# Altium PCB CLARA_PCB.PcbDoc
Units mil, origin at the board's own origin, x right, y up, seen from the top; angles counter-clockwise.
Board outline 1738.65 x 1689.34 mil, 2 copper layers (Top Layer, Bottom Layer); 108 components, 126 nets, 415 pads, 0 vias.
Unrouted connection lines stored in the file: 243.
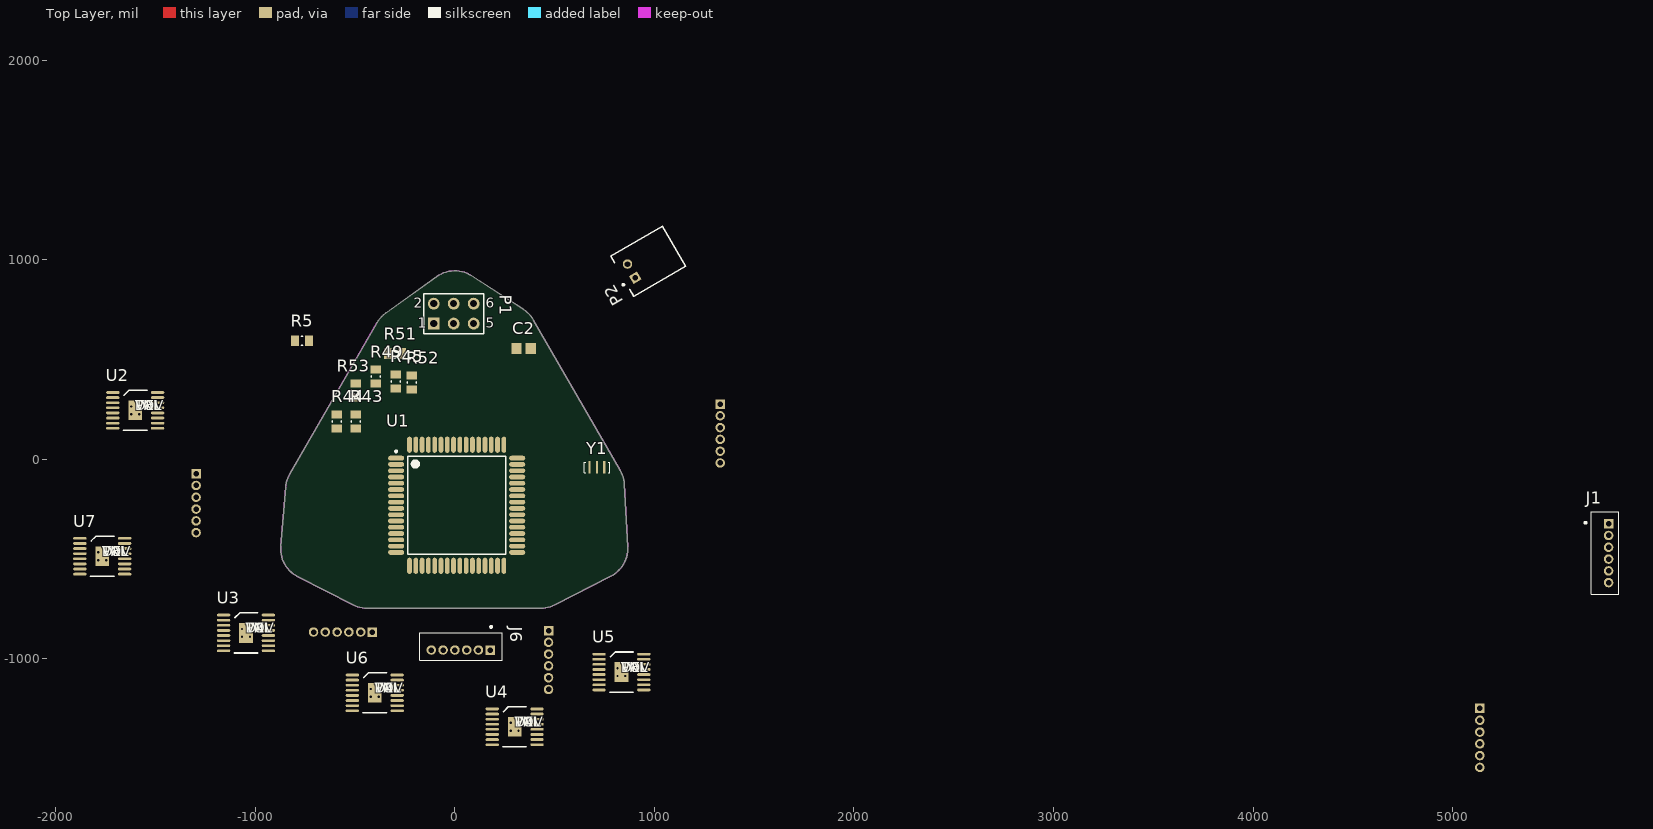
[diagram p0: Top Layer view]
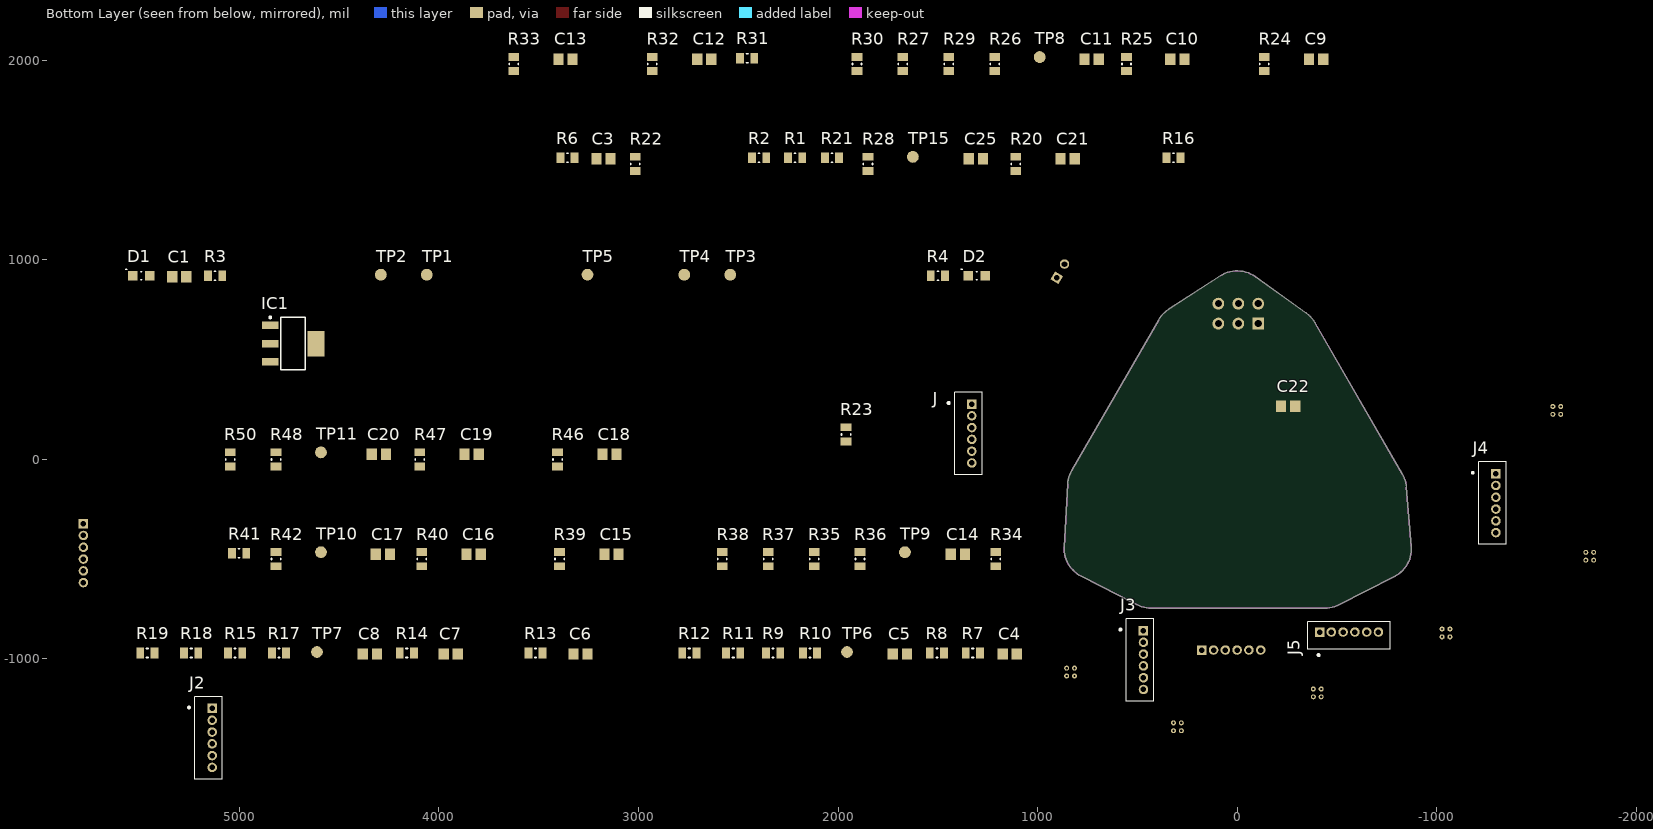
[diagram p1: Bottom Layer view, seen from below]

## Layer stack, top to bottom
Top Solder: solder mask 0.4, Solder Resist, Dk 3.5
Top Layer: signal copper 1.4
Dielectric 1: dielectric 12.6, FR-4, Dk 4.8
Bottom Layer: signal copper 1.4
Bottom Solder: solder mask 0.4, Solder Resist, Dk 3.5

## Board outline
-785.88,-587.88 -510.11,-728.16 ccw(c-438.7,-587.8) -438.7,-745.28 430.67,-745.28 ccw(c430.67,-587.8) 502.07,-728.16 780.68,-586.44 ccw(c709.28,-446.07) 866.54,-437.73 849.98,-125.58 ccw(c692.72,-133.93) 829.1,-55.19 394.41,697.72 ccw(c258.03,618.98) 343.89,750.99 86.11,918.64 ccw(c0.25,786.62) -91.43,914.66 -344.46,733.48 ccw(c-252.77,605.44) -389.16,684.18 -826.87,-73.96 ccw(c-690.48,-152.7) -847.45,-139.93 -871.44,-434.75 ccw(c-714.47,-447.52)

## Design rules (kind name [scope] priority, off if disabled: settings)
Clearance Clearance_1 [All] p1: gap=5 ignorepadtopadclearanceinfootprint=TRUE except(0: Arc-Hole Track-Hole SMDPad-Hole THPad-Hole Via-Hole Fill-Hole Poly-Hole Region-Hole Text-Hole; 10: Arc-SMDPad Track-SMDPad)
Clearance [All] p2: gap=10 ignorepadtopadclearanceinfootprint=FALSE except(0: Arc-Hole Track-Hole SMDPad-Hole THPad-Hole Via-Hole Fill-Hole Poly-Hole Region-Hole Text-Hole)
ComponentClearance ComponentClearance_1 [All] p1: gap=10 collisioncheckmode=3 verticalgap=10 showdistances=FALSE
PolygonConnect [All] p1: connectstyle=Relief reliefconductorwidth=10 reliefentries=4 polygonreliefangle="90 Angle" airgapwidth=10
RoutingVias [All] p1: holewidth=28 width=50 viastyle="Through Hole" minholewidth=28 minwidth=50 maxholewidth=28 maxwidth=50
SMDNeckDown [All] p1: percent=50.000
SolderMaskExpansion [All] p1: expansion=4 istentingtop=FALSE
Width [All] p1: maxlimit=10 minlimit=5 preferedwidth=10
29 further rules are at their usual default settings.

## Classes and differential pairs
component class MICROCONTROLLER: C1 C2 D1 D2 IC1 P1 P2 R3 R4 R5 R53 TP1 TP2 TP3 TP4 TP5 U1 Y1
component class LEAD_SCREW_MOTOR: C18 C19 C20 J6 R46 R47 R48 R49 R50 R51 R52 TP11
component class DRIVE_MOTORS: C9 C10 C11 C12 C13 C14 C15 C16 C17 J3 J4 J5 R24 R25 R26 R27 R29 R30 R31 R32 R33 R34 R35 R36 R37 R38 R39 R40 R41 R42 R43 R44 R45 TP8 TP9 TP10 U5 U6 U7
component class CABLE_MOTOR_DRIVERS: C3 C4 C5 C6 C7 C8 C21 C22 C25 J J1 J2 R1 R2 R6 R7 R8 R9 R10 R11 R12 R13 R14 R15 R16 R17 R18 R19 R20 R21 R22 R23 R28 TP6 TP7 TP15 U2 U3 U4

## Components (designator, comment, footprint, x,y, rotation, side; value= is the part's Value field where it differs from the comment)
C1 "10uF" CAP_ADJ_0805 5300,915 r180 bottom
C2 "10uF" CAP_ADJ_0805 345.43,555 r0 top
C3 "100nF" CAP_ADJ_0805 3175,1505 r180 bottom
C4 "100nF" CAP_ADJ_0805 1140,-975 r180 bottom
C5 "33nF" CAP_ADJ_0805 1690,-975 r180 bottom
C6 "100nF" CAP_ADJ_0805 3290,-975 r180 bottom
C7 "100nF" CAP_ADJ_0805 3940,-975 r180 bottom
C8 "33nF" CAP_ADJ_0805 4345,-975 r180 bottom
C9 "100nF" CAP_ADJ_0805 -395,2005 r180 bottom
C10 "100nF" CAP_ADJ_0805 300,2005 r180 bottom
C11 "33nF" CAP_ADJ_0805 730,2005 r180 bottom
C12 "100nF" CAP_ADJ_0805 2670,2005 r180 bottom
C13 "100nF" CAP_ADJ_0805 3365,2005 r180 bottom
C14 "33nF" CAP_ADJ_0805 1400,-475 r180 bottom
C15 "100nF" CAP_ADJ_0805 3135,-475 r180 bottom
C16 "100nF" CAP_ADJ_0805 3825,-475 r180 bottom
C17 "33nF" CAP_ADJ_0805 4280,-475 r180 bottom
C18 "100nF" CAP_ADJ_0805 3145,25 r180 bottom
C19 "100nF" CAP_ADJ_0805 3835,25 r180 bottom
C20 "33nF" CAP_ADJ_0805 4300,25 r180 bottom
C21 "100nF" CAP_ADJ_0805 850,1505 r180 bottom
C22 "100nF" CAP_ADJ_0805 -254.57,265 r180 bottom
C25 "33nF" CAP_ADJ_0805 1310,1505 r180 bottom
D1 "Green" LED_150080VS75000 5490,920 r180 bottom
D2 "Yellow" LED_150080VS75000 1305,920 r180 bottom
IC1 "NCP1117LPST50T3GOSCT-ND" NCP1117LPST50T3GOSCT-ND 4730,580 r180 bottom
J "B6B-ZR(LF)(SN)" JST_B6B-ZR(LF)(SN) 1330,129.53 r90 bottom
J1 "B6B-ZR(LF)(SN)" JST_B6B-ZR(LF)(SN) 5780,-470 r90 top
J2 "B6B-ZR(LF)(SN)" JST_B6B-ZR(LF)(SN) 5135,-1395.47 r90 bottom
J3 "B6B-ZR(LF)(SN)" JST_B6B-ZR(LF)(SN) 470,-1005 r90 bottom
J4 "B6B-ZR(LF)(SN)" JST_B6B-ZR(LF)(SN) -1295,-219.53 r90 bottom
J5 "B6B-ZR(LF)(SN)" JST_B6B-ZR(LF)(SN) -559.53,-865 r0 bottom
J6 "B6B-ZR(LF)(SN)" JST_B6B-ZR(LF)(SN) 30.47,-955 r0 top
P1 "ISP" HDR2X3 -105,680 r0 top
P2 "S2B-PH-K-S(LF)(SN)" JST-S2B-PH-K-S_V 968.85,992.32 r120 top
R1 "10KR" RES_ADJ_0805_YAGEO 2215,1510 r180 bottom
R2 "10KR" RES_ADJ_0805_YAGEO 2395,1510 r180 bottom
R3 "680R" RES_ADJ_0805_YAGEO 5120,920 r180 bottom
R4 "680R" RES_ADJ_0805_YAGEO 1500,920 r180 bottom
R5 "10KR" RES_ADJ_0805_YAGEO -765,595 r0 top
R6 "10KR" RES_ADJ_0805_YAGEO 3355,1510 r180 bottom
R7 "10KR" RES_ADJ_0805_YAGEO 1325,-970 r180 bottom
R8 "10KR" RES_ADJ_0805_YAGEO 1505,-970 r180 bottom
R9 "10KR" RES_ADJ_0805_YAGEO 2325,-970 r180 bottom
R10 "10KR" RES_ADJ_0805_YAGEO 2140,-970 r180 bottom
R11 "100mR" RES_ADJ_0805_YAGEO 2525,-970 r180 bottom
R12 "10KR" RES_ADJ_0805_YAGEO 2745,-970 r180 bottom
R13 "10KR" RES_ADJ_0805_YAGEO 3515,-970 r180 bottom
R14 "10KR" RES_ADJ_0805_YAGEO 4160,-970 r180 bottom
R15 "10KR" RES_ADJ_0805_YAGEO 5020,-970 r180 bottom
R16 "10KR" RES_ADJ_0805_YAGEO 320,1510 r180 bottom
R17 "10KR" RES_ADJ_0805_YAGEO 4800,-970 r180 bottom
R18 "100mR" RES_ADJ_0805_YAGEO 5240,-970 r180 bottom
R19 "10KR" RES_ADJ_0805_YAGEO 5460,-970 r180 bottom
R20 "10KR" RES_ADJ_0805_YAGEO 1110,1480 r90 bottom
R21 "10KR" RES_ADJ_0805_YAGEO 2030,1510 r180 bottom
R22 "10KR" RES_ADJ_0805_YAGEO 3015,1480 r90 bottom
R23 "10KR" RES_ADJ_0805_YAGEO 1960,125 r90 bottom
R24 "10KR" RES_ADJ_0805_YAGEO -135,1980 r90 bottom
R25 "10KR" RES_ADJ_0805_YAGEO 555,1980 r90 bottom
R26 "100mR" RES_ADJ_0805_YAGEO 1215,1980 r90 bottom
R27 "10KR" RES_ADJ_0805_YAGEO 1675,1980 r90 bottom
R28 "100mR" RES_ADJ_0805_YAGEO 1850,1480 r90 bottom
R29 "10KR" RES_ADJ_0805_YAGEO 1445,1980 r90 bottom
R30 "10KR" RES_ADJ_0805_YAGEO 1905,1980 r90 bottom
R31 "10KR" RES_ADJ_0805_YAGEO 2455,2010 r180 bottom
R32 "10KR" RES_ADJ_0805_YAGEO 2930,1980 r90 bottom
R33 "10KR" RES_ADJ_0805_YAGEO 3625,1980 r90 bottom
R34 "10KR" RES_ADJ_0805_YAGEO 1210,-500 r90 bottom
R35 "10KR" RES_ADJ_0805_YAGEO 2120,-500 r90 bottom
R36 "10KR" RES_ADJ_0805_YAGEO 1890,-500 r90 bottom
R37 "100mR" RES_ADJ_0805_YAGEO 2350,-500 r90 bottom
R38 "10KR" RES_ADJ_0805_YAGEO 2580,-500 r90 bottom
R39 "10KR" RES_ADJ_0805_YAGEO 3395,-500 r90 bottom
R40 "10KR" RES_ADJ_0805_YAGEO 4085,-500 r90 bottom
R41 "10KR" RES_ADJ_0805_YAGEO 5000,-470 r180 bottom
R42 "10KR" RES_ADJ_0805_YAGEO 4815,-500 r90 bottom
R43 "100mR" RES_ADJ_0805_YAGEO -495,190 r90 top
R44 "10KR" RES_ADJ_0805_YAGEO -590,189.57 r90 top
R45 "10KR" RES_ADJ_0805_YAGEO -295,390 r90 top
R46 "10KR" RES_ADJ_0805_YAGEO 3405,0 r90 bottom
R47 "10KR" RES_ADJ_0805_YAGEO 4095,0 r90 bottom
R48 "100mR" RES_ADJ_0805_YAGEO 4815,0 r90 bottom
R49 "10KR" RES_ADJ_0805_YAGEO -395,414.57 r90 top
R50 "10KR" RES_ADJ_0805_YAGEO 5045,0 r90 bottom
R51 "10KR" RES_ADJ_0805_YAGEO -300,530 r0 top
R52 "10KR" RES_ADJ_0805_YAGEO -215,384.57 r90 top
R53 "10KR" RES_ADJ_0805_YAGEO -495,344.57 r90 top
TP1 "TEST_POINT" TEST_POINT 4060,925 r180 bottom
TP2 "TEST_POINT" TEST_POINT 4290,925 r90 bottom
TP3 "TEST_POINT" TEST_POINT 2540,925 r90 bottom
TP4 "TEST_POINT" TEST_POINT 2770,925 r90 bottom
TP5 "TEST_POINT" TEST_POINT 3255,925 r90 bottom
TP6 "TEST_POINT" TEST_POINT 1955,-965 r90 bottom
TP7 "TEST_POINT" TEST_POINT 4610,-965 r90 bottom
TP8 "TEST_POINT" TEST_POINT 990,2015 r90 bottom
TP9 "TEST_POINT" TEST_POINT 1665,-465 r90 bottom
TP10 "TEST_POINT" TEST_POINT 4590,-465 r90 bottom
TP11 "TEST_POINT" TEST_POINT 4590,35 r90 bottom
TP15 "TEST_POINT" TEST_POINT 1625,1515 r90 bottom
U1 "ATmega64A-AU" 64A_M 10,-230 r0 top
U2 "DRV8801PWPR" PWP0016B_N -1600.32,245.31 r0 top
U3 "DRV8801PWPR" PWP0016B_N -1045.32,-869.69 r0 top
U4 "DRV8801PWPR" PWP0016B_N 300.31,-1339.69 r0 top
U5 "DRV8801PWPR" PWP0016B_N 835.31,-1065.32 r0 top
U6 "DRV8801PWPR" PWP0016B_N -400.32,-1169.69 r0 top
U7 "DRV8801PWPR" PWP0016B_N -1765.32,-485.32 r0 top
Y1 "CSTCE16M0V53-R0" CSTCE16M0V53-R0 712.6,-40 r0 top

## Footprints (in the part's own frame and the unit in brackets; to place one, negate y for a bottom-side part, rotate by r counter-clockwise, add the part's x,y. Pads: shape width x height; smd on the part's side, far side on the other; paste and mask are expansions set on the pad)
64A_M [mm] "Thin QFP, 64-Leads, Body 14x14mm, Pitch 0.8mm, IPC Low Density"
  oval 2.05x0.6 smd: 1(-7.7,6) 2(-7.7,5.2) 3(-7.7,4.4) 4(-7.7,3.6) 5(-7.7,2.8) 6(-7.7,2) 7(-7.7,1.2) 8(-7.7,0.4) 9(-7.7,-0.4) 10(-7.7,-1.2) 11(-7.7,-2) 12(-7.7,-2.8) 13(-7.7,-3.6) 14(-7.7,-4.4) 15(-7.7,-5.2) 16(-7.7,-6) 33(7.7,-6) 34(7.7,-5.2) 35(7.7,-4.4) 36(7.7,-3.6) 37(7.7,-2.8) 38(7.7,-2) 39(7.7,-1.2) 40(7.7,-0.4) 41(7.7,0.4) 42(7.7,1.2) 43(7.7,2) 44(7.7,2.8) 45(7.7,3.6) 46(7.7,4.4) 47(7.7,5.2) 48(7.7,6)
  oval 0.6x2.05 smd: 17(-6,-7.7) 18(-5.2,-7.7) 19(-4.4,-7.7) 20(-3.6,-7.7) 21(-2.8,-7.7) 22(-2,-7.7) 23(-1.2,-7.7) 24(-0.4,-7.7) 25(0.4,-7.7) 26(1.2,-7.7) 27(2,-7.7) 28(2.8,-7.7) 29(3.6,-7.7) 30(4.4,-7.7) 31(5.2,-7.7) 32(6,-7.7) 49(6,7.7) 50(5.2,7.7) 51(4.4,7.7) 52(3.6,7.7) 53(2.8,7.7) 54(2,7.7) 55(1.2,7.7) 56(0.4,7.7) 57(-0.4,7.7) 58(-1.2,7.7) 59(-2,7.7) 60(-2.8,7.7) 61(-3.6,7.7) 62(-4.4,7.7) 63(-5.2,7.7) 64(-6,7.7)
  silkscreen extent -7.82,-6.25 6.25,6.97, body extent -7,-7 7,7, height 1.6
CAP_ADJ_0805 [mm] "CERAMIC CAPACITOR SMD 0805"
  rect 1.3x1.45 smd: 1(-0.9,0) 2(0.9,0)
  body extent -1.1,-0.72 1.1,0.72, height 0.5
CSTCE16M0V53-R0 [mm] "CER RES 16.0000MHZ 15PF SMD"
  rect 0.3x1.6 smd: 1(-0.95,0) 2(0,0) 3(0.95,0)
  silkscreen extent -1.6,-0.66 1.6,0.66, body extent -1.6,-0.64 1.6,0.66, height 0.9
HDR2X3 [mm] "Connector; Header; 3x2 Position"
  rect 1.5x1.5 hole 0.9: 1(0,0)
  round 1.5 hole 0.9: 2(0,2.54) 3(2.54,0) 4(2.54,2.54) 5(5.08,0) 6(5.08,2.54)
  silkscreen extent -1.27,-1.27 6.35,3.81
JST-S2B-PH-K-S_V [mm] "THD, 2-Leads, Body 7.6x5.9mm, Pitch 2mm"
  rect 1.2x1.2 hole 0.7: 1(-1,2.45)
  round 1.2 hole 0.7: 2(1,2.45)
  silkscreen extent -2.95,-3.8 2.95,4.35, body extent -2.95,-3.8 2.95,3.8, height 4.8
JST_B6B-ZR(LF)(SN) [mm]
  rect 1.208x1.208 hole 0.7: 1(3.75,0)
  round 1.208 hole 0.7: 2(2.25,0) 3(0.75,0) 4(-0.75,0) 5(-2.25,0) 6(-3.75,0)
  silkscreen extent -5.25,-1.3 5.25,3.04, body extent -5.29,-1.72 5.21,1.78, height 4.5
LED_150080VS75000 [mm] "LED GREEN CLEAR 0805 SMD"
  rect 1.2x1.2 smd: 1(-1.1,0) 2(1.1,0)
  silkscreen extent -1.96,-0.5 0.05,0.86, body extent -1.05,-0.68 1.05,0.67, height 0.7
NCP1117LPST50T3GOSCT-ND [mm] "IC REG LINEAR 5V 1A SOT223"
  rect 2.15x0.95 smd: 1(-2.9,2.3) 2(-2.9,0) 3(-2.9,-2.3)
  rect 2.15x3.25 smd: 4(2.9,0)
  silkscreen extent -3.03,-3.35 1.55,3.45, body extent -3.5,-3.35 3.5,3.35, height 1.8
PWP0016B_N [mm] "IC MOTOR DRIVER PAR 16HTSSOP"
  oval 1.7x0.35 smd paste-0.102 mask+0.051: 1(-2.85,2.275) 2(-2.85,1.625) 3(-2.85,0.975) 4(-2.85,0.325) 5(-2.85,-0.325) 6(-2.85,-0.975) 7(-2.85,-1.625) 8(-2.85,-2.275) 9(2.85,-2.275) 10(2.85,-1.625) 11(2.85,-0.975) 12(2.85,-0.325) 13(2.85,0.325) 14(2.85,0.975) 15(2.85,1.625) 16(2.85,2.275)
  rect 1.75x2.5 smd paste-0.102 mask+0.051: 17(0,0)
  round 0.635 / inner round 1.524 / far side round 0.635 hole 0.3 mask+0.051: V(-0.5,-0.5) V(-0.5,0.5) V(0.5,-0.5) V(0.5,0.5)
  silkscreen extent -1.5,-2.55 1.5,2.55, body extent -3.21,-2.5 3.21,2.5, height 1.05
RES_ADJ_0805_YAGEO [mm] "RESISTOR ADJUSTABLE VALUE 0805"
  rect 1x1.35 smd: 1(-0.9,0) 2(0.9,0)
  silkscreen extent -0.1,-0.58 0.1,0.58, body extent -1.05,-0.67 1.05,0.67, height 0.6
TEST_POINT [mm] "TEST POINT PAD"
  round 1.5 smd: 1(0,0)

## Part data
C1 C2: library part CAP_ADJ_0805, "CERAMIC CAPACITOR SMD 0805", Case Code (Imperial)=0805, Case Code (Metric)=2012, Dielectric=X7R, Manufacturer="Taiyo Yuden", Manufacturer Part Number=TMK212BBJ106KG-T, Max Operating Temperature=85°C, Min Operating Temperature=-55°C, Package Quantity=1, Supplier Part Number 1=587-2985-1-ND, Tolerance=10%, Voltage=16V, Voltage Rating=25V, Capacitance=10uF, Case/Package=0805, ComponentLink1Description=https://datasheet.ciiva.com/139/mlcc-all-e-139570.pdf, ComponentLink1URL=https://datasheet.ciiva.com/139/mlcc-all-e-139570.pdf, ComponentLink2Description=https://datasheet.ciiva.com/139/mlcc-all-e-139571.pdf, ComponentLink2URL=https://datasheet.ciiva.com/139/mlcc-all-e-139571.pdf, ComponentLink3Description=https://datasheet.ciiva.com/30062/tmk212bbj106kg-t-30062083.pdf, ComponentLink3URL=https://datasheet.ciiva.com/30062/tmk212bbj106kg-t-30062083.pdf, ComponentLink4Description=https://datasheet.ciiva.com/139/mlcc-all-e-139572.pdf, ComponentLink4URL=https://datasheet.ciiva.com/139/mlcc-all-e-139572.pdf, ComponentLink5Description=https://datasheet.ciiva.com/7975/1481447-7975820.pdf, ComponentLink5URL=https://datasheet.ciiva.com/7975/1481447-7975820.pdf, Composition=Ceramic, Height=1.25mm, Lead Free="Lead Free", Length=0.079inch, Mount="Surface Mount", Number of Pins=2, Packaging="Tape and Reel", Pricing 1="1=0.19, 10=0.132, 100=0.0668, 500=0.0457, 1000=0.0404 (USD)", REACH SVHC="No SVHC", Stock 1=268572, Supplier 1=Digi-Key, Termination=SMD/SMT, Thickness=0.053inch, Voltage Rating (DC)=25V, Width=0.049inch
C3 C4 C6 C7 C9 C10 C12 C13 C15 C16 C18 C19 C21 C22: library part CAP_ADJ_0805, "CERAMIC CAPACITOR SMD 0805", Case Code (Imperial)=0805, Case Code (Metric)=2012, Dielectric=X7R, Dielectric Material=Ceramic, Manufacturer=KEMET, Manufacturer Part Number=C0805C104J5RACAUTO, Max Operating Temperature=125°C, Min Operating Temperature=-55°C, Package Quantity=1, Supplier Part Number 1=399-6925-1-ND, Tolerance=5%, Voltage Rating=50V, Capacitance=100nF, Case/Package=0805, ComponentLink1Description=http://components.arrow.com/part/dataview/0323_00324161, ComponentLink1URL=http://components.arrow.com/part/dataview/0323_00324161, ComponentLink2Description=http://www.farnell.com/datasheets/2123421.pdf, ComponentLink2URL=http://www.farnell.com/datasheets/2123421.pdf, ComponentLink3Description=https://search.kemet.com/component-edge/download/datasheet/C0805C104J5RACAUTO.pdf, ComponentLink3URL=https://search.kemet.com/component-edge/download/datasheet/C0805C104J5RACAUTO.pdf, Depth=1.25mm, Length=0.079inch, Mount="Surface Mount", Packaging="Cut Tape", Pricing 1="1=0.22, 10=0.152, 100=0.0769, 500=0.0526, 1000=0.0466 (USD)", REACH SVHC="No SVHC", Stock 1=9661, Supplier 1=Digi-Key, Thickness=0.035inch, Voltage Rating (DC)=50V, Width=0.049inch
C5 C8 C11 C14 C17 C20 C25: library part CAP_ADJ_0805, "CERAMIC CAPACITOR SMD 0805", Case Code (Imperial)=0805, Case Code (Metric)=2012, Dielectric=X7R, Manufacturer=Samsung, Manufacturer Part Number=CL21B333JBANNNC, Max Operating Temperature=125°C, Min Operating Temperature=-55°C, Package Quantity=1, Supplier Part Number 1=1276-2505-1-ND, Tolerance=5%, Voltage=50V, Capacitance=33nF, Case/Package=0805, ComponentLink1Description=https://datasheet.ciiva.com/26838/getdatasheetpartid-356482-26838724.pdf, ComponentLink1URL=https://datasheet.ciiva.com/26838/getdatasheetpartid-356482-26838724.pdf, ComponentLink2Description=https://datasheet.ciiva.com/25728/cl21b333jbannnc-25728473.pdf, ComponentLink2URL=https://datasheet.ciiva.com/25728/cl21b333jbannnc-25728473.pdf, Depth=1.25mm, Height=0.65mm, Length=2mm, Mount="Surface Mount", Packaging="Tape and Reel", Pricing 1="1=0.21, 10=0.151, 100=0.0711, 500=0.0499, 1000=0.0413 (USD)", Radiation Hardening=No, Stock 1=12525, Supplier 1=Digi-Key, Thickness=0.03inch, Voltage Rating=50V, Voltage Rating (DC)=50V, Width=0.049inch
D1: library part LED_GRN_150080VS75000, "LED GREEN CLEAR 0805 SMD", Case Code (Imperial)=0805, Case Code (Metric)=2012, Forward Current=30mA, Forward Voltage=2V, Manufacturer="Wurth Electronics", Manufacturer Part Number=150080VS75000, Max Operating Temperature=85°C, Min Operating Temperature=-40°C, Package Quantity=4000, Supplier Part Number 1=732-4986-1-ND, Test Current=20mA, Case/Package=0805, Colour=Green, ComponentLink1Description=https://datasheet.ciiva.com/22656/150080vs75000-22656966.pdf, ComponentLink1URL=https://datasheet.ciiva.com/22656/150080vs75000-22656966.pdf, ComponentLink2Description=https://datasheet.ciiva.com/29563/150080vs75000-29563018.pdf, ComponentLink2URL=https://datasheet.ciiva.com/29563/150080vs75000-29563018.pdf, ComponentLink3Description=https://datasheet.ciiva.com/29279/759437-da-01-en-chipled-0805-w-kl-h-gruen-150080vs7500-29279047.pdf, ComponentLink3URL=https://datasheet.ciiva.com/29279/759437-da-01-en-chipled-0805-w-kl-h-gruen-150080vs7500-29279047.pdf, Dominant Wavelength=570nm, Height=0.7mm, Length=2mm, Lens Style=Clear,Rectangular, Luminous Intensity=40mcd, Packaging="Tape and Reel", Pricing 1="1=0.17, 50=0.16, 100=0.137, 500=0.118 (USD)", REACH SVHC=Unknown, Stock 1=6059, Supplier 1=Digi-Key, Viewing Angle=140°, Wavelength=570nm, Width=1.25mm
D2: library part LED_YLW_150080YS75000, "LED YELLOW CLEAR 0805 SMD", Case Code (Imperial)=0805, Case Code (Metric)=2012, Forward Current=30mA, Forward Voltage=2V, Manufacturer="Wurth Electronics", Manufacturer Part Number=150080YS75000, Max Operating Temperature=85°C, Min Operating Temperature=-40°C, Package Quantity=4000, Supplier Part Number 1=732-4987-1-ND, Test Current=20mA, Case/Package=0805, Colour=Yellow, ComponentLink1Description=https://datasheet.ciiva.com/23843/150080ys75000-23843256.pdf, ComponentLink1URL=https://datasheet.ciiva.com/23843/150080ys75000-23843256.pdf, ComponentLink2Description=https://datasheet.ciiva.com/22656/1911353-22656971.pdf, ComponentLink2URL=https://datasheet.ciiva.com/22656/1911353-22656971.pdf, ComponentLink3Description=https://datasheet.ciiva.com/29563/150080ys75000-29563019.pdf, ComponentLink3URL=https://datasheet.ciiva.com/29563/150080ys75000-29563019.pdf, ComponentLink4Description=https://datasheet.ciiva.com/29563/150080ys75000-29563020.pdf, ComponentLink4URL=https://datasheet.ciiva.com/29563/150080ys75000-29563020.pdf, ComponentLink5Description=https://datasheet.ciiva.com/29563/150080ys75000-29563021.pdf, ComponentLink5URL=https://datasheet.ciiva.com/29563/150080ys75000-29563021.pdf, ComponentLink6Description=https://datasheet.ciiva.com/29279/759438-da-01-en-chipled-0805-w-kl-gelb-150080ys75000-29279034.pdf, ComponentLink6URL=https://datasheet.ciiva.com/29279/759438-da-01-en-chipled-0805-w-kl-gelb-150080ys75000-29279034.pdf, Dominant Wavelength=590nm, Height=0.7mm, Length=2mm, Lens Style=Clear,Rectangular, Luminous Intensity=120mcd, Packaging="Tape and Reel", Pricing 1="1=0.17, 50=0.16, 100=0.137, 500=0.118 (USD)", REACH SVHC=Unknown, Stock 1=1178, Supplier 1=Digi-Key, Viewing Angle=140°, Wavelength=590nm, Width=1.25mm
IC1: "IC REG LINEAR 5V 1A SOT223-4", Case/Package=SOT-223, Dropout Voltage=1.3V, Manufacturer="ON Semiconductor", Manufacturer Part Number=NCP1117LPST50T3G, Max Input Voltage=18V, Max Operating Temperature=125°C, Max Output Current=1A, Min Current Limit=1.1A, Min Input Voltage=-300mV, Min Operating Temperature=0°C, Min Output Voltage=5V, Package Quantity=4000, Quiescent Current=700uA, ComponentLink1Description=https://datasheet.ciiva.com/16209/ncp1117lp-d-16209559.pdf, ComponentLink1URL=https://datasheet.ciiva.com/16209/ncp1117lp-d-16209559.pdf, ComponentLink2Description=https://datasheet.ciiva.com/13013/ncp1117lp-d-82673-13013019.pdf, ComponentLink2URL=https://datasheet.ciiva.com/13013/ncp1117lp-d-82673-13013019.pdf, ComponentLink3Description=https://datasheet.ciiva.com/8231/ncp1117lp-d-8231038.pdf, ComponentLink3URL=https://datasheet.ciiva.com/8231/ncp1117lp-d-8231038.pdf, ComponentLink4Description=https://datasheet.ciiva.com/30477/0900766b8124f872-30477007.pdf, ComponentLink4URL=https://datasheet.ciiva.com/30477/0900766b8124f872-30477007.pdf, Contact Plating=Tin,Matte, Halogen Free="Halogen Free", Height=1.69mm, Lead Free="Lead Free", Length=6.7mm, Mount="Surface Mount", Nominal Output Voltage=5V, Number of Outputs=1, Number of Pins=3, Number of Regulators=1, Output Current=1A, Output Voltage=5V, Packaging="Tape and Reel", Polarity=Positive, Pricing 1="1=0.43, 10=0.351, 100=0.239, 500=0.1792, 1000=0.1344 (USD)", REACH SVHC="No SVHC", Stock 1=18977, Supplier 1=Digi-Key, Supplier Part Number 1=NCP1117LPST50T3GOSCT-ND, Width=3.7mm
J J1 J2 J3 J4 J5 J6: "Connector Header Through Hole 6 position 0.059 _1.50mm_", Package=None, Availability=Unavailable, MF="JST Sales", MP=B6B-ZR_LF__SN_, Price=None, SnapEDA_Link=https://www.snapeda.com/parts/B6B-ZR%28LF%29%28SN%29/JST%20Sales%20America%20Inc./view-part/279441/?ref=snap
P1: library part "Header 3X2", "Header, 3-Pin, Dual row", LatestRevisionDate=17-Jul-2002, LatestRevisionNote="Re-released for DXP Platform.", Publisher="Altium Limited"
P2: library part CMP-1755-00004-1, "Male Header, Pitch 2 mm, 1 x 2 Position, Height 4.8 mm, Tail Length 3.4 mm, -25 to 85 degC, RoHS, Bulk", Capacitance="10 uF", Case\Package=Radial, Max Operating Temperature="85 degC", Min Operating Temperature="-40 degC", Package Quantity=200, Tolerance=20%, Voltage Rating="50 V", ComponentLink1Description=Datasheet, ComponentLink1URL=http://www.jst-mfg.com/product/pdf/eng/ePH.pdf, DatasheetVersion=Dec-12, Diameter="5 mm", Height="11 mm", Lead Pitch="2 mm", Length="11 mm", Mount="Through Hole", PackageDescription="Male Header, Pitch 2 mm, 1 x 2 Position, Height 4.8 mm, Tail Length 3.4 mm", PackageReference=S2B-PH-K-S, Packaging=Bulk, Pins=2, Radiation Hardening=No, REACH SVHC="No SVHC", RoHSCompliant=true, Voltage Rating (DC)="50 V"
R1 R2 R5 R6 R7 R8 R9 R10 R12 R13 R14 R15 R16 R17 R19 R20 R21 R22 R23 R24 R25 R27 R29 R30 R31 R32 R33 R34 R35 R36 R38 R39 R40 R41 R42 R44 R45 R46 R47 R49 R50 R51 R52 R53: library part RES_ADJ_0805, "RESISTOR 0805 YAGEO", Case Code (Imperial)=0805, Case Code (Metric)=2012, Manufacturer=Yageo, Manufacturer Part Number=RC0805JR-0710KL, Max Operating Temperature=155°C, Min Operating Temperature=-55°C, Power Rating=125mW, Supplier Part Number 1=311-10KARDKR-ND, Temperature Coefficient=100ppm/°C, Tolerance=5%, Voltage Rating=150V, Case/Package=0805, ComponentLink1Description=https://datasheet.ciiva.com/7983/444164-7983765.pdf, ComponentLink1URL=https://datasheet.ciiva.com/7983/444164-7983765.pdf, ComponentLink2Description=https://datasheet.ciiva.com/7941/444164-7941870.pdf, ComponentLink2URL=https://datasheet.ciiva.com/7941/444164-7941870.pdf, ComponentLink3Description=https://datasheet.ciiva.com/7941/444164-7941871.pdf, ComponentLink3URL=https://datasheet.ciiva.com/7941/444164-7941871.pdf, Composition="Thick Film", Contact Plating=Tin,Matte, Depth=1.25mm, Height=0.5mm, Lead Free="Lead Free", Length=2mm, Military Standard=Not, Packaging="Tape and Reel", Pricing 1="1=0.1, 10=0.019, 100=0.0076, 1000=0.0034, 2500=0.003 (USD)", Radiation Hardening=No, REACH SVHC=Unknown, Resistance=10KR, Stock 1=1589050, Supplier 1=Digi-Key, Termination=SMD/SMT, Width=1.25mm
R3 R4: library part RES_ADJ_0805, "RESISTOR 0805 YAGEO", Case Code (Imperial)=0805, Case Code (Metric)=2012, Manufacturer=Yageo, Manufacturer Part Number=RC0805JR-07680RL, Max Operating Temperature=155°C, Min Operating Temperature=-55°C, Package Quantity=5000, Power Rating=125mW, Supplier Part Number 1=311-680ARDKR-ND, Temperature Coefficient=100ppm/°C, Tolerance=5%, Voltage Rating=150V, Case/Package=0805, ComponentLink1Description=https://datasheet.ciiva.com/7941/442941-7941989.pdf, ComponentLink1URL=https://datasheet.ciiva.com/7941/442941-7941989.pdf, ComponentLink2Description=https://datasheet.ciiva.com/7941/442941-7941990.pdf, ComponentLink2URL=https://datasheet.ciiva.com/7941/442941-7941990.pdf, Composition="Thick Film", Contact Plating=Tin,Lead,Matte, Depth=1.25mm, Height=0.5mm, Lead Free="Lead Free", Length=2mm, Military Standard=Not, Packaging="Tape and Reel", Pricing 1="1=0.1, 10=0.019, 100=0.0076, 1000=0.0034, 2500=0.003 (USD)", Radiation Hardening=No, REACH SVHC=Unknown, Resistance=680R, Stock 1=209478, Supplier 1=Digi-Key, Termination=SMD/SMT, Width=1.25mm
R11 R18 R26 R28 R37 R43 R48: library part RES_ADJ_0805, "RESISTOR 0805 YAGEO", Case Code (Imperial)=0805, Case Code (Metric)=2012, Manufacturer=Panasonic, Manufacturer Part Number=ERJ-6DSFR10V, Max Operating Temperature=155°C, Max Power Dissipation=500mW, Min Operating Temperature=-55°C, Supplier Part Number 1=P19308CT-ND, Temperature Coefficient=150ppm/°C, Tolerance=1%, Case/Package=0805, ComponentLink1Description=https://industrial.panasonic.com/cdbs/www-data/pdf/RDN0000/AOA0000C313.pdf, ComponentLink1URL=https://industrial.panasonic.com/cdbs/www-data/pdf/RDN0000/AOA0000C313.pdf, Composition="Thick Film", Height=0.028inch, Length=0.079inch, Number of Terminations=2, Packaging="Cut Tape", Pricing 1="1=0.5, 10=0.36, 25=0.266, 50=0.196, 100=0.1438, 250=0.1188, 500=0.098, 1000=0.0709 (USD)", Resistance=100mR, Stock 1=16904, Supplier 1=Digi-Key, Width=0.049inch
TP1 TP2 TP3 TP4 TP5 TP6 TP7 TP8 TP9 TP10 TP11 TP15: "TEST POINT PAD"
U1: library part CMP-0095-00307-2, "8-bit AVR Microcontroller, 2.7-5.5V, 16MHz, 64KB Flash, 2KB EEPROM, 4KB SRAM, 64-pin TQFP, Industrial Grade (-40°C to 85°C)", Code_JEDEC=MS-026-AEB, ComponentLink1Description="Manufacturer URL", ComponentLink1URL=http://www.atmel.com/, ComponentLink2Description="ATmega64A Datasheet", ComponentLink2URL=http://www.atmel.com/dyn/resources/prod_documents/doc8160.pdf, ComponentLink3Description="ATmega64A Summary", ComponentLink3URL=http://www.atmel.com/dyn/resources/prod_documents/8160S.pdf, DatasheetVersion="revC, Jul-2009", PackageDescription="64-Pin Plastic Thin Profile Quad Flat Pack, 14 x 14 x 1.0 mm Body, 0.8 mm Pitch (TQFP)", PackageReference=64A, PackageVersion="revC, Oct-2010", RevisionNote="DatasheetVersion updated. URLs added."
U2 U3 U4 U5 U6 U7: "IC MOTOR DRIVER PAR 16HTSSOP", Case/Package="HTSSOP EP", Manufacturer="Texas Instruments", Max Operating Temperature=85°C, Max Supply Voltage=38V, Min Operating Temperature=-40°C, Min Supply Voltage=8V, Nominal Supply Current=6mA, Operating Supply Voltage=36V, Output Current=2.8A, Package Quantity=2000, Quiescent Current=3.2mA, Supplier Part Number 1=296-25378-1-ND, ComponentLink1Description=https://datasheet.ciiva.com/1958/drv8801-1958736.pdf, ComponentLink1URL=https://datasheet.ciiva.com/1958/drv8801-1958736.pdf, ComponentLink2Description=https://datasheet.ciiva.com/1958/drv8801-1958737.pdf, ComponentLink2URL=https://datasheet.ciiva.com/1958/drv8801-1958737.pdf, ComponentLink3Description=https://datasheet.ciiva.com/15109/getdatasheetpartid-362071-15109493.pdf, ComponentLink3URL=https://datasheet.ciiva.com/15109/getdatasheetpartid-362071-15109493.pdf, ComponentLink4Description=https://datasheet.ciiva.com/26086/drv8801-26086021.pdf, ComponentLink4URL=https://datasheet.ciiva.com/26086/drv8801-26086021.pdf, ComponentLink5Description=https://datasheet.ciiva.com/3229/drv8801-3229006.pdf, ComponentLink5URL=https://datasheet.ciiva.com/3229/drv8801-3229006.pdf, ComponentLink6Description=https://datasheet.ciiva.com/1958/drv8801-1958735.pdf, ComponentLink6URL=https://datasheet.ciiva.com/1958/drv8801-1958735.pdf, ComponentLink7Description=https://datasheet.ciiva.com/41457/001013558-da-01-en-ic-motor-driver-drv8801pwpr-tssop-16-tid-41457316.pdf, ComponentLink7URL=https://datasheet.ciiva.com/41457/001013558-da-01-en-ic-motor-driver-drv8801pwpr-tssop-16-tid-41457316.pdf, Interface=Parallel, Lead Free="Lead Free", Logic Function=AND, Manufacturer Part Number=DRV8801PWPR, Mount="Surface Mount", Number of Outputs=1, Number of Pins=16, Packaging="Tape and Reel", Pricing 1="1=2.65, 10=2.377, 100=1.9109, 500=1.57, 1000=1.3008 (USD)", Radiation Hardening=No, REACH SVHC="No SVHC", Stock 1=45192, Supplier 1=Digi-Key, Weight=0.002212oz
Y1: "CER RES 16.0000MHZ 15PF SMD", Capacitance=15pF, Case/Package=SMD/SMT, Frequency=16MHz, Frequency Stability=0.3%, Frequency Tolerance=0.5%, Manufacturer=Murata, Max Operating Temperature=80°C, Min Operating Temperature=-20°C, Package Quantity=3000, Supplier Part Number 1=490-1198-6-ND, ComponentLink1Description=https://datasheet.ciiva.com/18183/getdatasheetpartid-152969-18183272.pdf, ComponentLink1URL=https://datasheet.ciiva.com/18183/getdatasheetpartid-152969-18183272.pdf, ComponentLink2Description=https://datasheet.ciiva.com/884/p16e-884477.pdf, ComponentLink2URL=https://datasheet.ciiva.com/884/p16e-884477.pdf, ComponentLink3Description=https://datasheet.ciiva.com/1361/1506176-1361293.pdf, ComponentLink3URL=https://datasheet.ciiva.com/1361/1506176-1361293.pdf, ComponentLink4Description=https://datasheet.ciiva.com/884/p16e-884478.pdf, ComponentLink4URL=https://datasheet.ciiva.com/884/p16e-884478.pdf, ComponentLink5Description=https://datasheet.ciiva.com/884/p16e-884479.pdf, ComponentLink5URL=https://datasheet.ciiva.com/884/p16e-884479.pdf, ComponentLink6Description=https://datasheet.ciiva.com/14132/ceralock-eng-bro-14132735.pdf, ComponentLink6URL=https://datasheet.ciiva.com/14132/ceralock-eng-bro-14132735.pdf, ComponentLink7Description=https://datasheet.ciiva.com/16216/l0430e-16216847.pdf, ComponentLink7URL=https://datasheet.ciiva.com/16216/l0430e-16216847.pdf, Composition=Ceramic, Contact Plating=Gold, Height=0.039inch, Impedance=40R, Lead Free="Lead Free", Length=0.126inch, Load Capacitance=15pF, Manufacturer Part Number=CSTCE16M0V53-R0, Number of Pins=3, Packaging="Tape and Reel", Pricing 1="1=0.5, 10=0.42, 50=0.3776, 100=0.3357, 500=0.3189, 1000=0.2686 (USD)", REACH SVHC="No SVHC", Self Resonant Frequency=16MHz, Stock 1=103535, Supplier 1=Digi-Key, Termination=SMD/SMT, Tolerance=0.5%, Width=0.051inch

## Nets (pads, with @x,y where several pads share a name; then routed paths per layer and width w, separated by ;. In a path a pad name is that pad's centre, name@x,y a point inside that pad or via, vN(x,y) a via of type N, cw(c..) or ccw(c..) an arc to the next point about the centre after c; other vN are vias at no path point)
"5V MCU": J1.5 J2.5 J3.5 J4.5 J5.5 J6.5 J.5 R1.2 R9.2 R10.2 R15.2 R17.2 R21.2 R27.2 R29.2 R35.2 R36.2 R41.2 R42.2 R49.2 R50.2 U1.21 U1.52 U1.62 U1.64
5V_IN: C2.2 IC1.2 IC1.4 P1.2 R3.1 TP1.1
5V_MCU: R5.1 R7.2 R14.2 R20.2 R25.2 R33.2 R40.2 R47.2 R53.1
GND: C1.1 C2.1 C5.1 C8.1 C11.1 C14.1 C17.1 C20.1 C25.1 D1.1 D2.1 IC1.1 J1.2 J2.2 J3.2 J4.2 J5.2 J6.2 J.2 P1.6 P2.1 R2.1 R8.1 R11.2 R12.2 R18.2 R19.1 R22.2 R23.2 R26.2 R28.2 R30.1 R31.2 R34.1 R37.2 R38.2 R43.2 R44.1 R45.2 R48.2 R51.1 R52.2 U1.22 U1.53 U1.63 U2.4 U2.13 U2.17 U3.4 U3.13 U3.17 U4.4 U4.13 U4.17 U5.4 U5.13 U5.17 U6.4 U6.13 U6.17 U7.4 U7.13 U7.17 Y1.2
MISO: P1.1 TP5.1 U1.13
MOSI: P1.4 TP4.1 U1.12
NetC1_2: C1.2 IC1.3 P2.2 TP2.1
NetC3_1: C3.1 U3.14
NetC4_1: C4.1 U3.12
NetC4_2: C4.2 U3.11
NetC5_2: C5.2 R6.1
NetC6_1: C6.1 U4.14
NetC7_1: C7.1 U4.12
NetC7_2: C7.2 U4.11
NetC8_2: C8.2 R13.1
NetC9_1: C9.1 U5.14
NetC10_1: C10.1 U5.12
NetC10_2: C10.2 U5.11
NetC11_2: C11.2 R24.1
NetC12_1: C12.1 U6.14
NetC13_1: C13.1 U6.12
NetC13_2: C13.2 U6.11
NetC14_2: C14.2 R32.1
NetC15_1: C15.1 U7.14
NetC16_1: C16.1 U7.12
NetC16_2: C16.2 U7.11
NetC17_2: C17.2 R39.1
NetC18_1: C18.1
NetC19_1: C19.1
NetC19_2: C19.2
NetC20_2: C20.2 R46.1
NetC21_1: C21.1 U2.12
NetC21_2: C21.2 U2.11
NetC22_1: C22.1 U2.14
NetC25_2: C25.2 R16.1
NetD1_2: D1.2 R3.2
NetD2_2: D2.2 R4.1
NetJ1_1: J1.1 U3.7
NetJ1_3: J1.3 U1.37
NetJ1_4: J1.4 U1.38
NetJ1_6: J1.6 U3.10
NetJ2_1: J2.1 U4.7
NetJ2_3: J2.3 U1.45
NetJ2_4: J2.4 U1.44
NetJ2_6: J2.6 U4.10
NetJ3_1: J3.1 U5.7
NetJ3_3: J3.3 U1.41
NetJ3_4: J3.4 U1.42
NetJ3_6: J3.6 U5.10
NetJ4_1: J4.1 U6.7
NetJ4_3: J4.3 U1.27
NetJ4_4: J4.4 U1.28
NetJ4_6: J4.6 U6.10
NetJ5_1: J5.1 U7.7
NetJ5_3: J5.3 U1.31
NetJ5_4: J5.4 U1.32
NetJ5_6: J5.6 U7.10
NetJ6_1: J6.1
NetJ6_3: J6.3 U1.56
NetJ6_4: J6.4 U1.57
NetJ6_6: J6.6
NetJ_1: J.1 U2.7
NetJ_3: J.3 U1.49
NetJ_4: J.4 U1.48
NetJ_6: J.6 U2.10
NetR1_1: R1.1 U2.2
NetR2_2: R2.2 U1.51 U2.6
NetR6_2: R6.2 U3.15
NetR7_1: R7.1 TP6.1 U3.1
NetR8_2: R8.2 U1.35 U3.6
NetR9_1: R9.1 U3.2
NetR10_1: R10.1 U3.5
NetR11_1: R11.1 U3.8
NetR12_1: R12.1 U3.16
NetR13_2: R13.2 U4.15
NetR14_1: R14.1 TP7.1 U4.1
NetR15_1: R15.1 U4.2
NetR16_2: R16.2 U2.15
NetR17_1: R17.1 U4.5
NetR18_1: R18.1 U4.8
NetR19_2: R19.2 U1.47 U4.6
NetR20_1: R20.1 TP15.1 U2.1
NetR21_1: R21.1 U2.5
NetR22_1: R22.1 U2.16
NetR23_1: R23.1 U4.16
NetR24_2: R24.2 U5.15
NetR25_1: R25.1 TP8.1 U5.1
NetR26_1: R26.1 U5.8
NetR27_1: R27.1 U5.2
NetR28_1: R28.1 U2.8
NetR29_1: R29.1 U5.5
NetR30_2: R30.2 U1.39 U5.6
NetR31_1: R31.1 U5.16
NetR32_2: R32.2 U6.15
NetR33_1: R33.1 TP9.1 U6.1
NetR34_2: R34.2 U1.25 U6.6
NetR35_1: R35.1 U6.2
NetR36_1: R36.1 U6.5
NetR37_1: R37.1 U6.8
NetR38_1: R38.1 U6.16
NetR39_2: R39.2 U7.15
NetR40_1: R40.1 TP10.1 U7.1
NetR41_1: R41.1 U7.2
NetR42_1: R42.1 U7.5
NetR43_1: R43.1 U7.8
NetR44_2: R44.2 U1.29 U7.6
NetR45_1: R45.1 U7.16
NetR46_2: R46.2
NetR47_1: R47.1 TP11.1
NetR48_1: R48.1
NetR49_1: R49.1
NetR50_1: R50.1
NetR51_2: R51.2 U1.54
NetR52_1: R52.1
NetR53_2: R53.2 U1.1
NetU1_23: U1.23 U1.24 Y1.1 Y1.3
NetU1_26: U1.26 U6.3
NetU1_30: U1.30 U7.3
NetU1_36: U1.36 U3.3
NetU1_40: U1.40 U5.3
NetU1_46: U1.46 U4.3
NetU1_50: U1.50 U2.3
NetU1_55: U1.55
RESET: P1.5 R5.2 U1.20
SCK: P1.3 R4.2 TP3.1 U1.10
VMM: C3.2 C6.2 C9.2 C12.2 C15.2 C18.2 C22.2 U2.9 U3.9 U4.9 U5.9 U6.9 U7.9
pads on no net: U1.2 U1.3 U1.4 U1.5 U1.6 U1.7 U1.8 U1.9 U1.11 U1.14 U1.15 U1.16 U1.17 U1.18 U1.19 U1.33 U1.34 U1.43 U1.58 U1.59 U1.60 U1.61 U2.V U3.V U4.V U5.V U6.V U7.V

## Keep-outs
Keep-Out Layer:
  lines w0.5: -389.16,684.18 -826.87,-73.96 ccw(c-690.49,-152.7) -847.45,-139.93 -871.44,-434.75 ccw(c-714.47,-447.52) -785.88,-587.88 -510.11,-728.16 ccw(c-438.7,-587.8) -438.7,-745.28 430.67,-745.28 ccw(c430.67,-587.8) 502.07,-728.16 780.68,-586.44 ccw(c709.28,-446.07) 866.54,-437.73 849.98,-125.58 ; -91.43,914.66 cw(c0.25,786.62) 86.11,918.64 ; 394.41,697.72 829.1,-55.19

## Text inside footprints (layer, text, board x,y; h text height)
P1: Top Overlay "6" at 155,760 h50; Top Overlay "5" at 155,660 h50; Top Overlay "2" at -205,760 h50; Top Overlay "1" at -185,660 h50
U2: Top Overlay "DEV" at -1600.32,245.31 h50; Top Overlay "PN" at -1600.32,245.31 h50; Top Overlay "VAL" at -1600.32,245.31 h50; Top Overlay "TOL" at -1600.32,245.31 h50
U3: Top Overlay "DEV" at -1045.32,-869.69 h50; Top Overlay "PN" at -1045.32,-869.69 h50; Top Overlay "VAL" at -1045.32,-869.69 h50; Top Overlay "TOL" at -1045.32,-869.69 h50
U4: Top Overlay "DEV" at 300.31,-1339.69 h50; Top Overlay "PN" at 300.31,-1339.69 h50; Top Overlay "VAL" at 300.31,-1339.69 h50; Top Overlay "TOL" at 300.31,-1339.69 h50
U5: Top Overlay "DEV" at 835.31,-1065.32 h50; Top Overlay "PN" at 835.31,-1065.32 h50; Top Overlay "VAL" at 835.31,-1065.32 h50; Top Overlay "TOL" at 835.31,-1065.32 h50
U6: Top Overlay "DEV" at -400.32,-1169.69 h50; Top Overlay "PN" at -400.32,-1169.69 h50; Top Overlay "VAL" at -400.32,-1169.69 h50; Top Overlay "TOL" at -400.32,-1169.69 h50
U7: Top Overlay "DEV" at -1765.32,-485.32 h50; Top Overlay "PN" at -1765.32,-485.32 h50; Top Overlay "VAL" at -1765.32,-485.32 h50; Top Overlay "TOL" at -1765.32,-485.32 h50